# Altium PCB pcblayout.PcbDoc
Units mm, origin at the board's own origin, x right, y up, seen from the top; angles counter-clockwise.
Board outline 152.4 x 101.6 mm, 2 copper layers (Top Layer, Bottom Layer); 15 components, 19 nets, 48 pads, 0 vias.
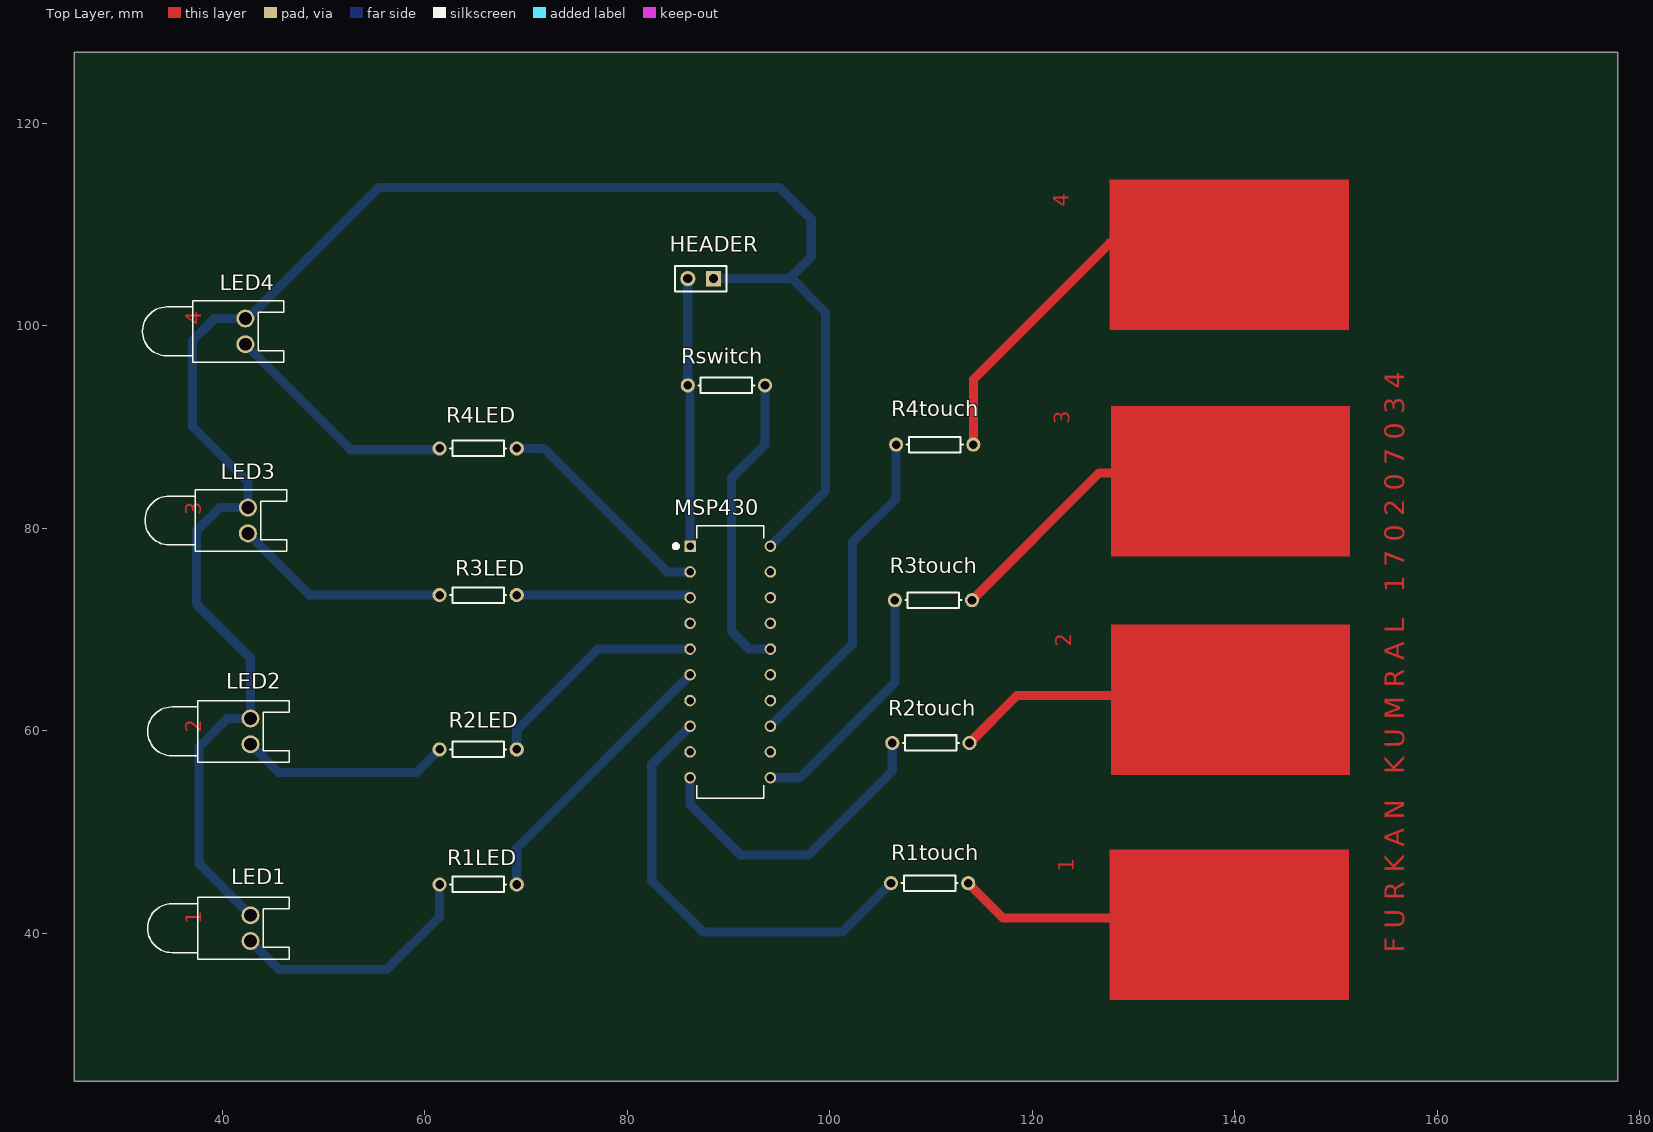
[diagram p0: Top Layer view]
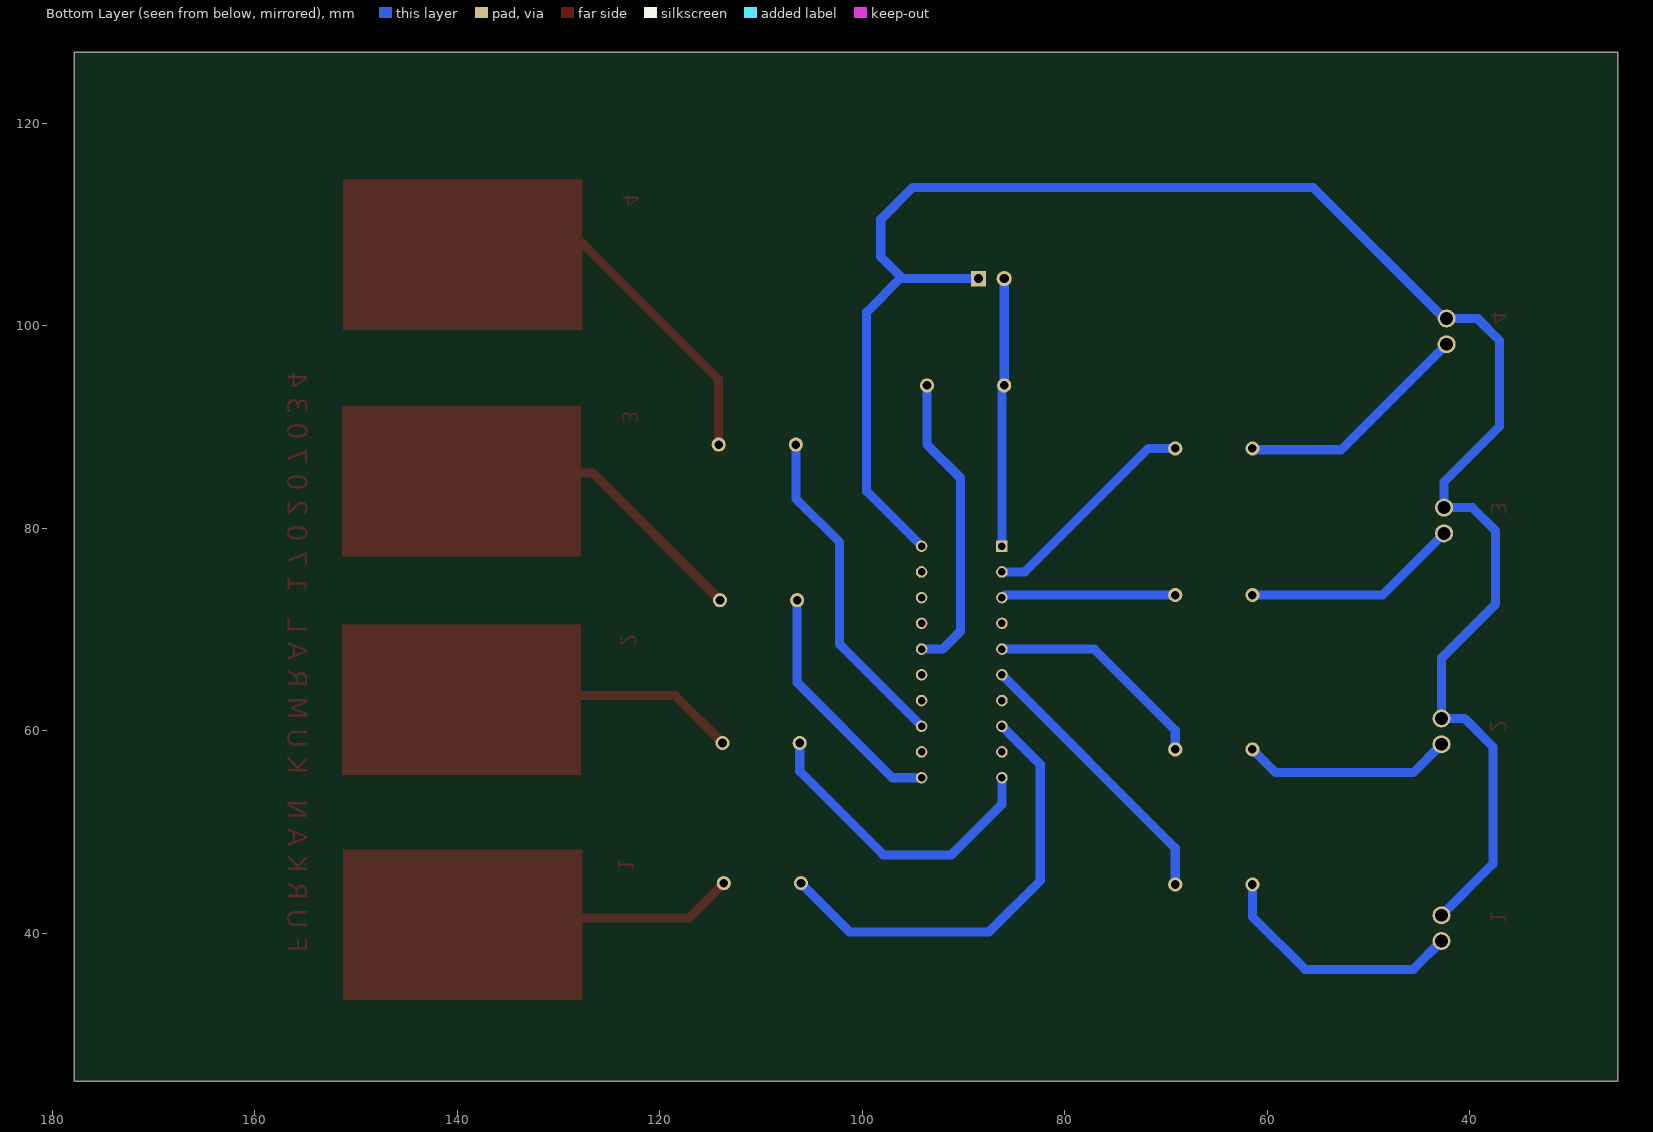
[diagram p1: Bottom Layer view, seen from below]

## Layer stack, top to bottom
Top Solder: solder mask 0.0102, Solder Resist, Dk 3.5
Top Layer: signal copper 0.0356
Dielectric 1: dielectric 0.32, FR-4, Dk 4.8
Bottom Layer: signal copper 0.0356
Bottom Solder: solder mask 0.0102, Solder Resist, Dk 3.5

## Board outline
25.4,25.4 177.8,25.4 177.8,127 25.4,127

## Design rules (kind name [scope] priority, off if disabled: settings)
Clearance [All] p1: gap=0.254
PolygonConnect [All] p1: connectstyle=Relief reliefconductorwidth=0.254 reliefentries=4 polygonreliefangle="90 Angle" airgapwidth=0.254
RoutingVias [All] p1: holewidth=0.711 width=1.27 viastyle="Through Hole" minholewidth=0.711 minwidth=1.27 maxholewidth=0.711 maxwidth=1.27
SolderMaskExpansion [All] p1: expansion=0.102
UnpouredPolygon [All] p1: allowunpoured=FALSE
Width [All] p1: maxlimit=0.9 minlimit=0.9 preferedwidth=0.9 minimp=50.000000 maximp=50.000000 favimp=50.000000
29 further rules are at their usual default settings.

## Components (designator, comment, footprint, x,y, rotation, side; value= is the part's Value field where it differs from the comment)
HEADER "Header 2" HDR1X2 88.519,104.648 r180 top
LED1 "LED4" LED-0 42.799,40.513 r270 top
LED2 "LED3" LED-0 42.799,59.944 r270 top
LED3 "LED2" LED-0 42.545,80.772 r270 top
LED4 "LED1" LED-0 42.291,99.441 r270 top
MSP430 "MSP430G2553IN20" *DIP794W45P254L2692H508Q20 90.17,66.802 r0 top
R1LED "Res1" AXIAL-0.3 65.278,44.831 r0 top
R1touch "Res1" AXIAL-0.3 109.855,44.958 r0 top
R2LED "Res1" AXIAL-0.3 65.278,58.166 r0 top
R2touch "Res1" AXIAL-0.3 109.982,58.801 r0 top
R3LED "Res1" AXIAL-0.3 65.278,73.406 r0 top
R3touch "Res1" AXIAL-0.3 110.236,72.898 r0 top
R4LED "Res1" AXIAL-0.3 65.278,87.884 r0 top
R4touch "Res1" AXIAL-0.3 110.363,88.265 r0 top
Rswitch "Rswitch" AXIAL-0.3 89.789,94.107 r180 top

## Footprints (in the part's own frame and the unit in brackets; to place one, negate y for a bottom-side part, rotate by r counter-clockwise, add the part's x,y. Pads: shape width x height; smd on the part's side, far side on the other; paste and mask are expansions set on the pad)
*DIP794W45P254L2692H508Q20 [mm]
  rect 1.14x1.14 hole 0.74: 1(-3.97,11.43)
  round 1.14 hole 0.74: 2(-3.97,8.89) 3(-3.97,6.35) 4(-3.97,3.81) 5(-3.97,1.27) 6(-3.97,-1.27) 7(-3.97,-3.81) 8(-3.97,-6.35) 9(-3.97,-8.89) 10(-3.97,-11.43) 11(3.97,-11.43) 12(3.97,-8.89) 13(3.97,-6.35) 14(3.97,-3.81) 15(3.97,-1.27) 16(3.97,1.27) 17(3.97,3.81) 18(3.97,6.35) 19(3.97,8.89) 20(3.97,11.43)
  silkscreen extent -5.57,-13.46 3.3,13.46
AXIAL-0.3 [mm] "Axial Device, Thru-Hole; 2 Leads; 0.3 in Pin Spacing"
  round 1.4 hole 0.85: 1(-3.81,0) 2(3.81,0)
  silkscreen extent -2.77,-0.76 2.77,0.76
HDR1X2 [mm] "Connector; Header; 2 Position"
  rect 1.5x1.5 hole 0.9: 1(0,0)
  round 1.5 hole 0.9: 2(2.54,0)
  silkscreen extent -1.27,-1.27 3.81,1.27
LED-0 [mil] "LED; 2 Leads"
  round 70 hole 50: 1(50,0) 2(-50,0)
  silkscreen extent -120,-400 120,150

## Part data
HEADER: "Header, 2-Pin"
LED1 LED2 LED3 LED4: library part LED0, "Typical INFRARED GaAs LED"
MSP430: "MSP430G2x53, MSP430G2x13 Mixed Signal Microcontroller 20-PDIP -40 to 85"
R1LED R1touch R2LED R2touch R3LED R3touch R4LED R4touch: "Resistor"
Rswitch: library part Res1, "Resistor"

## Nets (pads, with @x,y where several pads share a name; then routed paths per layer and width w, separated by ;. In a path a pad name is that pad's centre, name@x,y a point inside that pad or via, vN(x,y) a via of type N, cw(c..) or ccw(c..) an arc to the next point about the centre after c; other vN are vias at no path point)
GND: HEADER.1 LED1.2 LED2.2 LED3.2 LED4.2 MSP430.20 | length 183.6
  Bottom Layer w0.9: LED1.2 37.719,46.863 37.719,58.42 40.513,61.214 LED2.2 42.799,67.183 37.465,72.517 37.465,79.756 39.751,82.042 LED3.2 42.545,84.582 37.084,90.043 37.084,98.552 39.243,100.711 LED4.2 42.545,100.711 55.499,113.665 94.996,113.665 98.171,110.49 98.171,106.807 96.139,104.775 ; HEADER.1 96.012,104.648 96.139,104.775 ; MSP430.20 99.568,83.66 99.568,101.346 96.139,104.775
NetLED1_1: LED1.1 R1LED.1 | length 25.2
  Bottom Layer w0.9: LED1.1 45.593,36.449 56.261,36.449 61.468,41.656 R1LED.1
NetLED2_1: LED2.1 R2LED.1 | length 20.8
  Bottom Layer w0.9: LED2.1 45.593,55.88 59.182,55.88 R2LED.1
NetLED3_1: LED3.1 R3LED.1 | length 21.4
  Bottom Layer w0.9: LED3.1 48.641,73.406 R3LED.1
NetLED4_1: LED4.1 R4LED.1 | length 23.5
  Bottom Layer w0.9: LED4.1 52.705,87.757 61.341,87.757 R4LED.1
NetMSP430_2: MSP430.2 R4LED.2 | length 22.2
  Bottom Layer w0.9: R4LED.2 71.755,87.884 83.947,75.692 MSP430.2
NetMSP430_3: MSP430.3 R3LED.2 | length 17.2
  Bottom Layer w0.9: R3LED.2 85.946,73.406 MSP430.3
NetMSP430_5: MSP430.5 R2LED.2 | length 22.3
  Bottom Layer w0.9: R2LED.2 69.088,60.071 77.089,68.072 MSP430.5
NetMSP430_6: MSP430.6 R1LED.2 | length 27.8
  Bottom Layer w0.9: R1LED.2 69.088,48.42 MSP430.6
NetMSP430_8: MSP430.8 R1touch.1 | length 44.5
  Bottom Layer w0.9: MSP430.8 82.423,56.675 82.423,45.212 87.503,40.132 101.219,40.132 R1touch.1
NetMSP430_10: MSP430.10 R2touch.1 | length 30.9
  Bottom Layer w0.9: MSP430.10 86.2,52.738 91.186,47.752 97.917,47.752 106.172,56.007 R2touch.1
NetMSP430_11: MSP430.11 R3touch.1 | length 24.3
  Bottom Layer w0.9: MSP430.11 97.028,55.372 106.426,64.77 R3touch.1
NetMSP430_13: MSP430.13 R4touch.1 | length 33
  Bottom Layer w0.9: MSP430.13 102.235,68.547 102.235,78.613 106.553,82.931 R4touch.1
NetMSP430_16: MSP430.16 Rswitch.1 | length 30.2
  Bottom Layer w0.9: Rswitch.1 93.599,88.265 90.297,84.963 90.297,69.85 92.075,68.072 MSP430.16
NetR1touch_2: R1touch.2 | length 23.6
  Top Layer w0.9: R1touch.2 117.094,41.529 133.35,41.529 ; 128.085,40.894 129.228,42.037 ; 128.085,41.529 128.72,40.894
NetR2touch_2: R2touch.2 | length 23.4
  Top Layer w0.9: R2touch.2 118.491,63.5 133.604,63.5 ; 128.085,63.5 129.228,64.643
NetR3touch_2: R3touch.2 | length 20.3
  Top Layer w0.9: R3touch.2 126.619,85.471 129.159,85.471
NetR4touch_2: R4touch.2 | length 27.5
  Top Layer w0.9: R4touch.2 114.173,94.684 127.693,108.204 129.09,106.807
VCC: HEADER.2 MSP430.1 Rswitch.2 | length 26.5
  Bottom Layer w0.9: HEADER.2 Rswitch.2 86.2,93.886 MSP430.1
pads on no net: MSP430.4 MSP430.7 MSP430.9 MSP430.12 MSP430.14 MSP430.15 MSP430.17 MSP430.18 MSP430.19

## Other copper
Top Layer:
  rectangle net NetR1touch_2: 127.635,33.401 151.257,48.26
  rectangle net NetR2touch_2: 127.762,55.626 151.384,70.485
  rectangle net NetR3touch_2: 127.762,77.216 151.384,92.075
  rectangle net NetR4touch_2: 127.635,99.568 151.257,114.427
  text "4" at 123.571,111.76 h1.52 r90
  text "4" at 37.915,100.076 h1.52 r90
  text "3" at 123.698,90.297 h1.52 r90
  text "3" at 37.915,81.28 h1.52 r90
  text "2" at 123.825,68.326 h1.52 r90
  text "2" at 37.915,59.817 h1.52 r90
  text "1" at 124.079,46.101 h1.52 r90
  text "1" at 37.915,40.894 h1.52 r90
  text "F U R K A N   K U M R A L   1 7 0 2 0 7 0 3 4" at 156.718,38.1 h1.95 r90